# EAGLE board splitter (EAGLE 7.3.0)
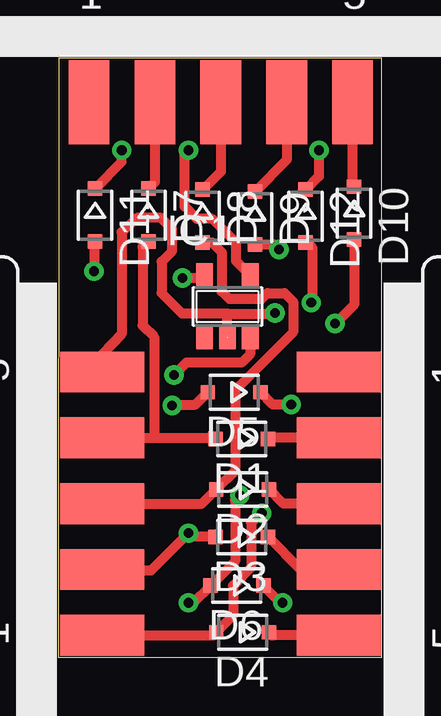
[diagram p0: board, top side]
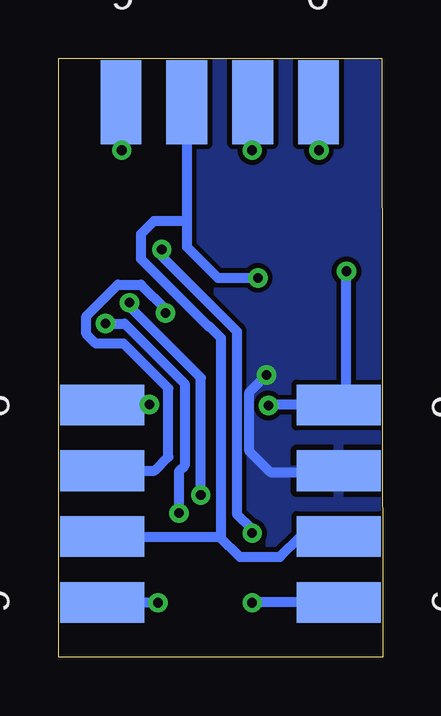
[diagram p1: board, bottom side, seen from below]

No outline drawn. Coordinates in mm, seen from the top.
Copper layers (1*16): Top 0.035mm / dielectric 1.5mm / Bottom 0.035mm
Design rules "default": minimum track width 10mil, minimum drill 24mil, track to track 8mil, track to pad 8mil, pad to pad 8mil, via to via 8mil, smd to smd 8mil, copper to edge 40mil, drill to drill 8mil, minimum pad ring 10mil, minimum via ring 8mil, stop-mask expansion 4mil, vias tented up to drill 0mil, thermal gap 10mil
Milling: 4 lines

## Footprints (pad centres in the part's own frame; a part is rotated, then mirrored left to right if it is on the bottom)
SOD323-R = smd 0.6 x 0.6: A 1.1,0; C -1.1,0
SOT23-5 = smd 0.69 x 0.99: 1 -0.95,-1.29; 2 0,-1.29; 3 0.95,-1.29; 4 0.95,1.3; 5 -0.95,1.3
F09D = smd 1.7 x 3.5: 1 -5.486,-6.045; 2 -2.743,-6.045; 3 0,-6.045; 4 2.743,-6.045; 5 5.486,-6.045 | smd 1.7 x 3.5 bottom: 6 -4.115,-6.045; 7 -1.372,-6.045; 8 1.372,-6.045; 9 4.115,-6.045

## Placement (x,y rotation side)
D1  [SOD323-R]  7.66,9.09 180 top
D2  [SOD323-R]  7.7,6.99 180 top
D3  [SOD323-R]  7.66,5 180 top
D4  [SOD323-R]  7.7,1.03 180 top
D5  [SOD323-R]  7.34,11.03 180 top
D6  [SOD323-R]  7.46,2.98 180 top
D7  [SOD323-R]  3.77,18.41 270 top
D8  [SOD323-R]  6.03,18.38 270 top
D9  [SOD323-R]  8.22,18.3 270 top
D10  [SOD323-R]  12.34,18.49 270 top
D11  [SOD323-R]  1.55,18.41 270 top
D12  [SOD323-R]  10.32,18.38 270 top
IC1  74LVC1G04DBV  [SOT23-5]  7.06,14.61 0 top
X1  male  [F09D]  17.74,6.39 270 top
X2  male  [F09D]  6.79,29.17 0 top
X3  female  [F09D]  -4.21,6.39 90 top

## Library data of the parts
D1-D12 = diode
IC1 = 74xx-little-de
X1-X3 = con-subd; OC_FARNELL: unknown; OC_NEWARK: unknown

## Nets
/SELECT: IC1.4 X2.7
DOWN: D3.A D9.A X3.2
FIRE1: D6.A D12.A X3.6
FIRE2: D5.A D11.A X3.9
GND: IC1.3 X3.8
LEFT: D2.A D8.A X3.3
N$3: D2.C X1.3
N$4: D8.C X2.3
N$5: D1.C X1.2
N$6: D3.C X1.4
N$7: D7.C X2.2
N$8: D9.C X2.4
N$9: D10.C X2.5
N$10: D4.C X1.5
N$11: D6.C X1.9
N$12: D5.C X1.6
N$13: D12.C X2.9
N$14: D11.C X2.6
RIGHT: D1.A D7.A X3.4
SELECT: IC1.2 X1.7 X3.5
UP: D4.A D10.A X3.1
VCC: IC1.5 X1.8 X2.8 X3.7

## Tracks (layer width: path | path; a pad name or v marks a point on that pad's centre or on a via)
/SELECT  (via drill 0.4)
  Top 0.406: IC1.4 7.42,16.5 7.42,17.26 6.43,18.26 5.79,18.26 5.28,18.77 5.28,20.95 v5.44,21.11
  Bottom 0.406: X2.7 5.42,21.14 v5.44,21.11
DOWN  (via drill 0.4)
  Top 0.406: X3.2 1.88,3.61 3.88,3.61 v5.44,5.16 5.6,5 D3.A | D9.A 9,17.2 v9.21,16.99
  Bottom 0.406: v5.44,5.16 5.44,5.32 6.07,5.95 6.07,13.57 9.21,16.71 v9.21,16.99
FIRE1  (via drill 0.4)
  Top 0.406: v5.44,2.26 5.65,2.26 D6.A 7.38,4 7.38,6.55 v7.58,6.75 | D12.A 10.39,17.27 10.6,17.07 10.6,14.8 v10.56,14.76
  Bottom 0.406: X3.6 5.42,2.27 v5.44,2.26 | v10.56,14.76 10.56,14.61 7.58,11.63 v7.58,6.75
FIRE2  (via drill 0.4)
  Top 0.406: v4.76,10.48 4.8,10.52 5.73,10.52 D5.A | D11.A 1.52,17.32 v1.51,16.07
  Bottom 0.406: v4.76,10.48 4.74,10.5 2.49,10.5 2.18,10.81 X3.9 1.51,10.84 v1.51,16.07
GND  (via drill 0.4)
  Top 0.406: IC1.3 8.01,12.62 7.66,12.26 5.36,12.26 v4.84,11.75
  Bottom 0.406: X3.8 1.86,7.7 4.68,7.7 5.56,8.57 5.56,11.03 v4.84,11.75
  pour Bottom: 0.28,0.24 0.28,24.73 13.22,24.77 13.22,0.28
LEFT
  Top 0.406: X3.3 6,6.39 D2.A 7.38,7.77 7.38,11.11 9.8,13.53 9.8,14.8 9.45,15.16 8.73,15.16 8.49,14.92 7.14,14.92 6.83,15.24 6.83,16.87 6.42,17.27 D8.A
N$3
  Top 0.406: X1.3 9.39,6.39 D2.C
N$4
  Top 0.406: X2.3 6.79,20.23 D8.C
N$5
  Top 0.406: X1.2 8.8,9.13 D1.C
N$6
  Top 0.406: X1.4 10.11,3.65 D3.C
N$7
  Top 0.406: X2.2 4.04,19.79 D7.C
N$8
  Top 0.406: X2.4 9.53,20.71 D9.C
N$9
  Top 0.406: X2.5 12.27,19.66 D10.C
N$10
  Top 0.406: X1.5 8.93,0.9 D4.C
N$11  (via drill 0.4)
  Top 0.406: v9.37,2.26 9.37,2.37 9.17,2.37 D6.C
  Bottom 0.406: X1.9 9.38,2.27 v9.37,2.26
N$12  (via drill 0.4)
  Top 0.406: v9.72,10.52 8.96,10.52 D5.C
  Bottom 0.406: X1.6 9.74,10.5 v9.72,10.52
N$13  (via drill 0.4)
  Top 0.406: v10.87,21.11 10.87,20.03 D12.C
  Bottom 0.406: X2.9 10.9,21.14 v10.87,21.11
N$14  (via drill 0.4)
  Top 0.406: D11.C 2.66,20.63 v2.66,21.11
  Bottom 0.406: X2.6 2.67,21.13 v2.66,21.11
RIGHT
  Top 0.406: X3.4 4.05,9.13 | 4.05,9.13 6.51,9.13 D1.A | 4.05,9.13 4.01,9.17 4.01,13.34 3.53,13.81 3.53,17.08 D7.A 3.77,17.22
SELECT  (via drill 0.4)
  Top 0.406: 1.23,11.99 1.38,11.84 X3.5 1.86,11.9 1.86,12.62 2.66,13.45 2.66,17.7 3.29,18.3 4.29,18.3 4.76,17.82 4.76,16.91 4.33,16.47 4.33,15.16 5.18,14.31 7.06,14.31 | 7.06,14.31 9.03,14.31 v9.05,14.33 | IC1.2 7.06,14.31
  Bottom 0.406: X1.7 9.5,7.76 8.93,8.33 8.93,11.19 10.79,13.06 11.95,13.06 12.34,13.45 12.34,14.21 11.03,15.52 10.08,15.52 9.05,14.49 v9.05,14.33
UP  (via drill 0.4)
  Top 0.406: X3.1 6.47,0.9 D4.A 7.3,1.74 7.3,2.98 8.06,3.73 8.06,5.6 8.45,5.99 v8.49,5.99 | D10.A 12.34,14.68 v11.55,13.89
  Bottom 0.406: v11.55,13.89 10.76,13.89 8.26,11.39 8.26,7.98 8.49,7.74 v8.49,5.99
VCC  (via drill 0.4)
  Top 0.406: v5.2,15.8 6,15.8 IC1.5
  Bottom 0.406: X1.8 6.8,5.02 | 6.8,5.02 5.95,4.17 4.29,4.17 3.41,5.04 1.86,5.04 X3.7 | v5.2,15.8 6.87,15.8 8.16,17.09 8.16,18.14 | X2.8 8.16,18.14 | 8.16,18.14 8.2,18.18 9.53,18.18 10.08,17.62 10.08,16.59 7.26,13.77 7.22,13.77 6.75,13.29 6.75,5.08 6.8,5.02